# EAGLE board working (EAGLE 9.6.2)
REV: A
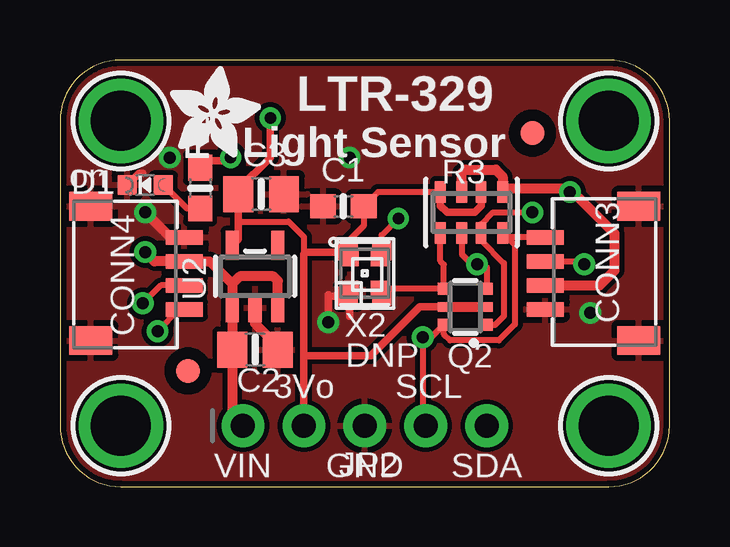
[diagram p0: board, top side]
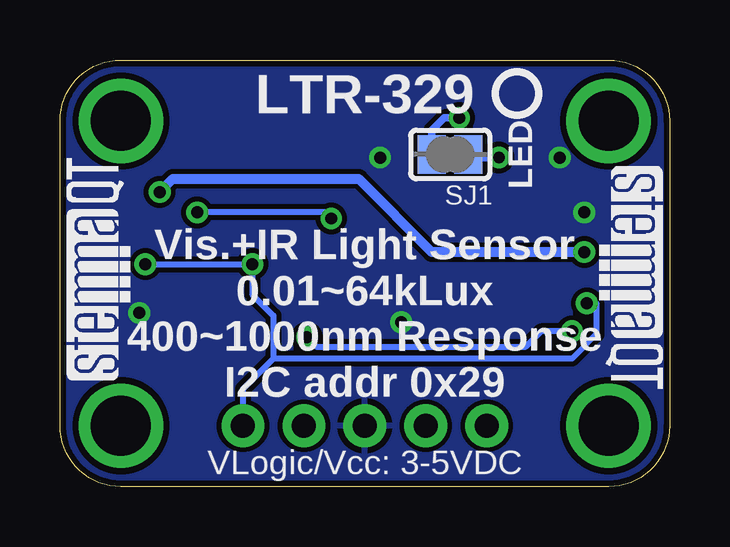
[diagram p1: board, bottom side, seen from below]

Size 25.4 x 17.78 mm. Coordinates in mm from the lower left corner, seen from the top.
Outline: 0,15.24 0,2.54 arc90 2.54,0 22.86,0 arc90 25.4,2.54 25.4,15.24 arc90 22.86,17.78 2.54,17.78 arc90 0,15.24
Copper layers (1*16): Top 0.035mm / dielectric 1.5mm / Bottom 0.035mm
Design rules "adafruit *": minimum track width 8mil, minimum drill 15.5mil, track to track 8mil, track to pad 8mil, pad to pad 8mil, via to via 8mil, smd to smd 8mil, copper to edge 10mil, drill to drill 8mil, minimum pad ring 10mil, minimum via ring 8mil, stop-mask expansion 2mil, vias tented up to drill 20mil, thermal gap 10mil
Net classes: 1 highpower: width 0.305 mm, drill 0.483 mm; 2 lowpower: width 0.254 mm, drill 0.483 mm

## Footprints (pad centres in the part's own frame; a part is rotated, then mirrored left to right if it is on the bottom)
0603-NO = smd 1.075 x 1: 1 -0.85,0; 2 0.85,0
0805-NO = smd 1.24 x 1.5: 1 -0.95,0; 2 0.95,0
JST_SH4 = smd 0.6 x 1.55: 1 -1.5,2.514; 2 -0.5,2.514; 3 0.5,2.514; 4 1.5,2.514 | smd 1.2 x 1.8: MT1 -2.8,-1.386; MT2 2.8,-1.386
CHIPLED_0603_NOOUTLINE = smd 0.8 x 0.8: A 0,-0.75; C 0,0.75
GUVX_UV = smd 0.8 x 0.8: 1 -0.95,0.7; 2 -0.95,-0.7; 3 0.95,-0.7; 4 0.95,0.7
FIDUCIAL_1MM = smd 1 x 1: 1 0,0
1X05_ROUND_70 = drill 1 pad 1.778: 1 -5.08,0; 2 -2.54,0; 3 0,0; 4 2.54,0; 5 5.08,0
SOT363 = smd 0.5 x 0.5: 1 -0.75,-0.9; 3 0.75,-0.9; 4 0.75,0.9; 6 -0.75,0.9 | smd 0.4 x 0.5: 2 0,-0.9; 5 0,0.9
RESPACK_4X0603 = smd 0.45 x 0.9: 1 -1.3,-0.85; 2 -0.4,-0.85; 3 0.4,-0.85; 4 1.3,-0.85; 5 1.3,0.85; 6 0.4,0.85; 7 -0.4,0.85; 8 -1.3,0.85
SOLDERJUMPER_CLOSEDWIRE = smd 1.168 x 1.6: 1 -0.762,0; 2 0.762,0 | smd 0.635 x 0.203: WIRE 0,0
SOT23-5 = smd 0.55 x 1.2: 1 -0.95,-1.3; 2 0,-1.3; 3 0.95,-1.3; 4 0.95,1.3; 5 -0.95,1.3
MOUNTINGHOLE_2.5_PLATED = drill 2.5 pad 3.2: P$1 0,0
LTR-329 = smd 0.7 x 0.75: 1 -0.6,0.675; 2 -0.6,-0.675; 3 0.6,-0.675; 4 0.6,0.675

## Placement (x,y rotation side)
C1  0.1uF  [0603-NO]  11.81,11.68 180 top
C2  10uF  [0805-NO]  8.13,5.71 0 top
C3  10uF  [0805-NO]  8.38,12.19 0 top
CONN3  STEMMA_I2C_QT  [JST_SH4]  22.73,8.89 90 top
CONN4  STEMMA_I2C_QT  [JST_SH4]  2.67,8.89 270 top
D1  GREEN  [CHIPLED_0603_NOOUTLINE]  3.56,12.57 90 top
DNP  DNP  [GUVX_UV]  12.7,8.89 90 top
FID3  FIDUCIAL_1MM  [FIDUCIAL_1MM]  5.33,4.83 0 top
FID4  FIDUCIAL_1MM  [FIDUCIAL_1MM]  19.68,14.73 0 top
JP2  [1X05_ROUND_70]  12.7,2.54 0 top
Q2  BSS138  [SOT363]  16.89,7.49 90 top
R1  47K  [0603-NO]  5.84,12.45 270 top
R3  10K  [RESPACK_4X0603]  17.14,11.43 180 top
SJ1  [SOLDERJUMPER_CLOSEDWIRE]  9.14,13.84 180 bottom
U2  AP2127K-3.3  [SOT23-5]  8.13,8.76 0 top
U$1  MOUNTINGHOLE2.5  [MOUNTINGHOLE_2.5_PLATED]  2.54,15.24 0 top
U$17  MOUNTINGHOLE2.5  [MOUNTINGHOLE_2.5_PLATED]  22.86,15.24 0 top
U$19  MOUNTINGHOLE2.5  [MOUNTINGHOLE_2.5_PLATED]  2.54,2.54 0 top
U$21  MOUNTINGHOLE2.5  [MOUNTINGHOLE_2.5_PLATED]  22.86,2.54 0 top
U$22  [ADAFRUIT_3.5MM]  4.57,13.72 0 top
U$25  [PCBFEAT-REV-040]  6.35,16.38 0 bottom
U$30  [STEMMAQT]  22.48,4.45 90 bottom
U$31  [STEMMAQT]  2.92,13.34 270 bottom
X2  LTR-329  [LTR-329]  12.7,8.89 0 top

## Library data of the parts
C1-C3 CONN3 CONN4 D1 JP2 Q2 R1 R3 SJ1 U$22 U$25 = microbuilder
DNP X2 = adafruit_sensor
FID3 FID4 = microbuilder; BOM: EXCLUDE
U2 = adafruit_power
U$1 U$17 U$19 U$21 = adafruit_electromech; BOM: EXCLUDE
U$30 U$31 = silks

## Nets
3.3V [lowpower]: C1.1 C3.1 DNP.4 JP2.2 Q2.2 Q2.5 R3.2 R3.4 SJ1.2 U2.5 X2.1
GND [highpower]: C1.2 C2.2 C3.2 CONN3.1 CONN3.MT1 CONN3.MT2 CONN4.1 CONN4.MT1 CONN4.MT2 D1.C DNP.1 JP2.3 U2.2 X2.2
N$1: D1.A R1.2
N$2 [lowpower]: R1.1 SJ1.1
SCL: CONN3.4 CONN4.4 JP2.4 Q2.6 R3.8
SCL_3V: DNP.3 Q2.1 R3.7 X2.4
SDA: CONN3.3 CONN4.3 JP2.5 Q2.3 R3.6
SDA_3V: DNP.2 Q2.4 R3.5 X2.3
VCC [highpower]: C2.1 CONN3.2 CONN4.2 JP2.1 R3.1 R3.3 U2.1 U2.3

## Tracks (layer width: path | path; a pad name or v marks a point on that pad's centre or on a via)
3.3V  (via drill 0.48)
  Top 0.254: 7.43,11.05 9.53,11.05 10.16,10.41 10.16,9.69 | R3.4 13.26,12.28 C1.1 12.66,10.88 12,10.22 DNP.4 11.94,9.78 11.9,9.78
  Top 0.305: R3.2 17.55,11.7 17.27,11.43 16.13,11.43 15.85,11.71 R3.4 | U2.5 7.43,10.32 7.43,11.05 C3.1 7.43,12.38 8.76,13.72 v8.76,15.37 | JP2.2 10.16,5.46 | 10.16,5.46 10.16,9.69 10.25,9.78 11.9,9.78 | 10.16,5.46 12.95,5.46 14.99,7.49 Q2.5 | X2.1 12.1,9.74 DNP.4
  Top 0.406: Q2.5 Q2.2
  Bottom 0.305: SJ1.2 9.91,14.86 9.4,15.37 v8.76,15.37
GND  (via drill 0.5)
  Top 0.305: D1.C 3.31,13.07 3.44,13.07 | 9.53,12.38 C3.2 | DNP.1 11.24,7.94 11.18,8 v11.18,6.86 | DNP.1 12.06,7.88 12.06,7.11 | DNP.1 12,8.12 X2.2
  Top 0.406: U2.2 8.13,6.79 9.08,5.84 C2.2 | CONN4.1 4.6,10.39 v3.56,11.43
  other vias: 22.1,7.24 12.06,13.72 4.57,13.72
  pour Top: 0,17.78 25.4,17.78 25.4,0 0,0
  pour Bottom: 0,17.78 25.4,17.78 25.4,0 0,0
N$1
  Top 0.254: D1.A 5.28,11.6 R1.2
N$2  (via drill 0.48)
  Top 0.305: v7.11,13.72 7.11,13.59 6.13,13.59 R1.1
  Bottom 0.305: SJ1.1 8.26,13.72 v7.11,13.72
SCL  (via drill 0.5)
  Top 0.254: CONN3.4 18.64,10.39 R3.8 18.95,10.07 18.95,6.76 18.29,6.1 16.26,6.1 15.99,6.36 Q2.6 15.47,6.22 v15.11,6.22 15.11,2.67 JP2.4 | CONN4.4 4.98,7.39 v4.06,6.48
  Bottom 0.254: v15.11,6.22 14.73,5.84 5.99,5.84 5.36,6.48 v4.06,6.48
SCL_3V  (via drill 0.48, 0.5)
  Top 0.254: v19.68,11.43 18.03,11.43 17.55,10.94 R3.7 17.55,10.27 18.5,9.32 18.5,7.11 18.13,6.74 Q2.1 | DNP.3 13.4,10.48 v14.1,11.18
  Top 0.305: X2.4 13.3,9.74 DNP.3
  Bottom 0.254: v14.1,11.18 14.35,11.43 v19.68,11.43
SDA  (via drill 0.5)
  Top 0.254: R3.6 16.75,9.69 17.16,9.27 v17.38,9.27 17.38,9.13 17.79,9.13 Q2.3 | CONN4.3 4.2,8.39 v3.45,7.64 | CONN3.3 21.73,9.39 v21.84,9.27
  Bottom 0.254: v3.45,7.64 3.05,7.64 3.05,6.35 4.06,5.33 16.51,5.33 | v21.84,9.27 v17.38,9.27 17.38,8 16.51,7.13 16.51,5.33 | 16.51,5.33 17.78,4.06 JP2.5
SDA_3V
  Top 0.254: R3.5 15.85,9.4 15.99,9.26 Q2.4 13.7,8.24 DNP.2
  Top 0.305: DNP.2 13.3,8.04 X2.3
VCC  (via drill 0.5)
  Top 0.406: R3.3 16.75,13.06 16.89,13.21 18.16,13.21 18.45,12.92 R3.1 18.57,12.41 21.12,12.41 v21.25,12.28 21.38,12.28 23.11,10.54 23.11,9.02 22.49,8.39 CONN3.2 | U2.3 9.08,8.57 8.89,8.76 7.49,8.76 7.18,8.45 | 7.18,8.45 U2.1 C2.1 7.18,2.98 JP2.1 | 7.18,8.45 6.24,9.39 CONN4.2 3.94,9.39 v3.56,9.78
  Bottom 0.406: v21.25,12.28 20.7,12.83 12.95,12.83 9.91,9.78 v3.56,9.78

## Text on the board
tPlace: LTR-329 | Light Sensor | on | 3Vo | SCL | VIN | GND | SDA
bPlace: LTR-329 | LED | Vis.+IR Light Sensor / 0.01~64kLux / 400~1000nm Response / I2C addr 0x29 | VLogic/Vcc: 3-5VDC